# Altium PCB PCB1.PcbDoc
Units mm, origin at the board's own origin, x right, y up, seen from the top; angles counter-clockwise.
Board outline 43.25 x 20.85 mm, 2 copper layers (Top Layer, Bottom Layer); 12 components, 11 nets, 37 pads, 7 vias.
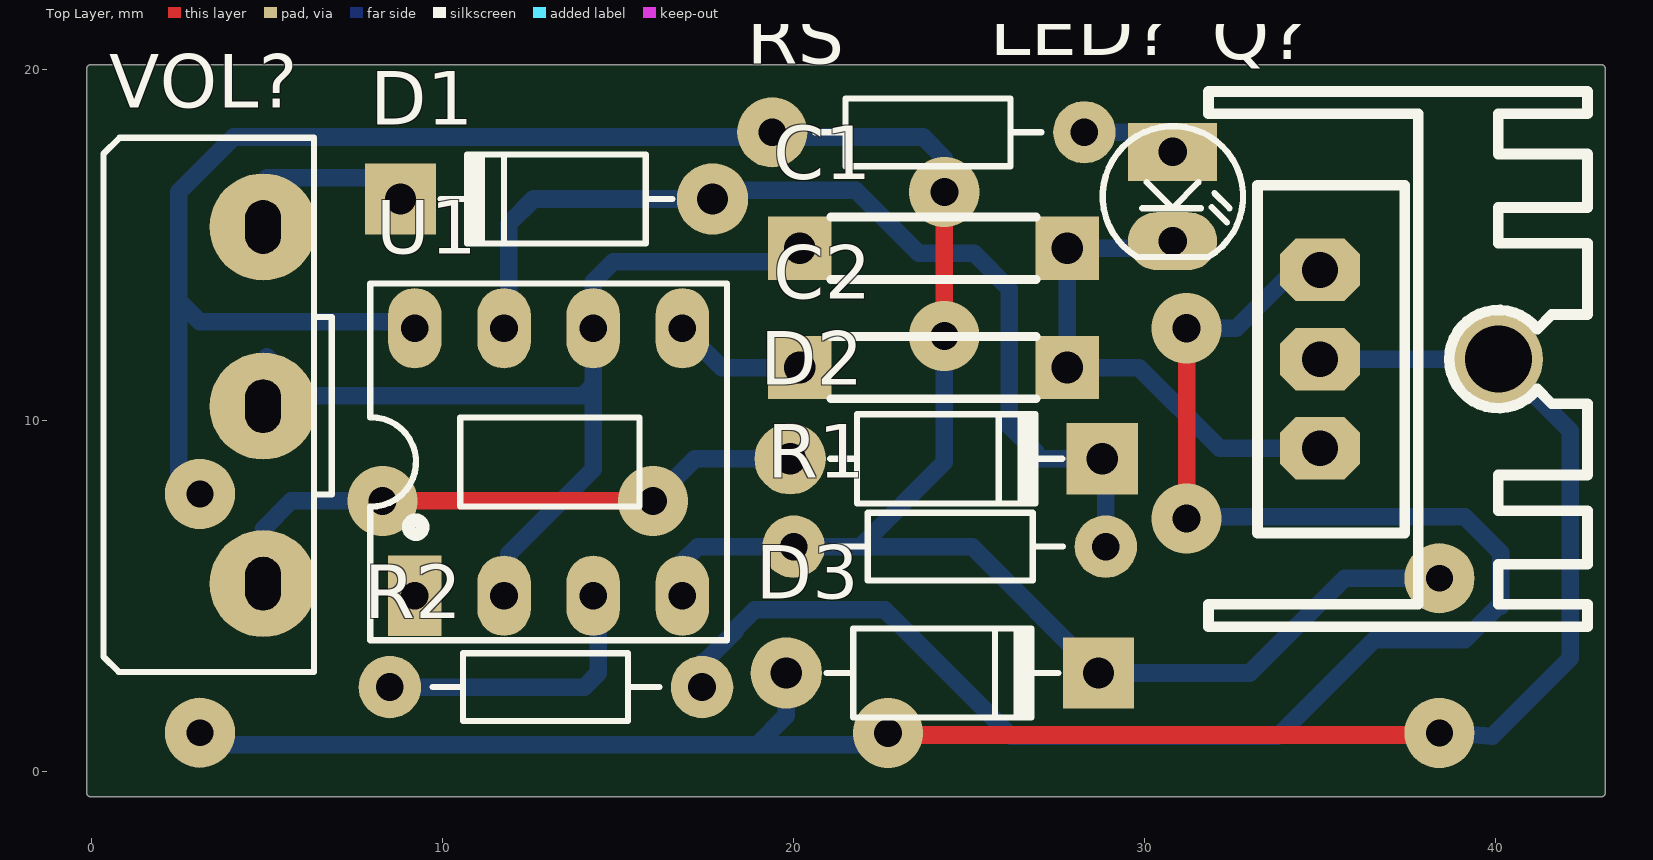
[diagram p0: Top Layer view]
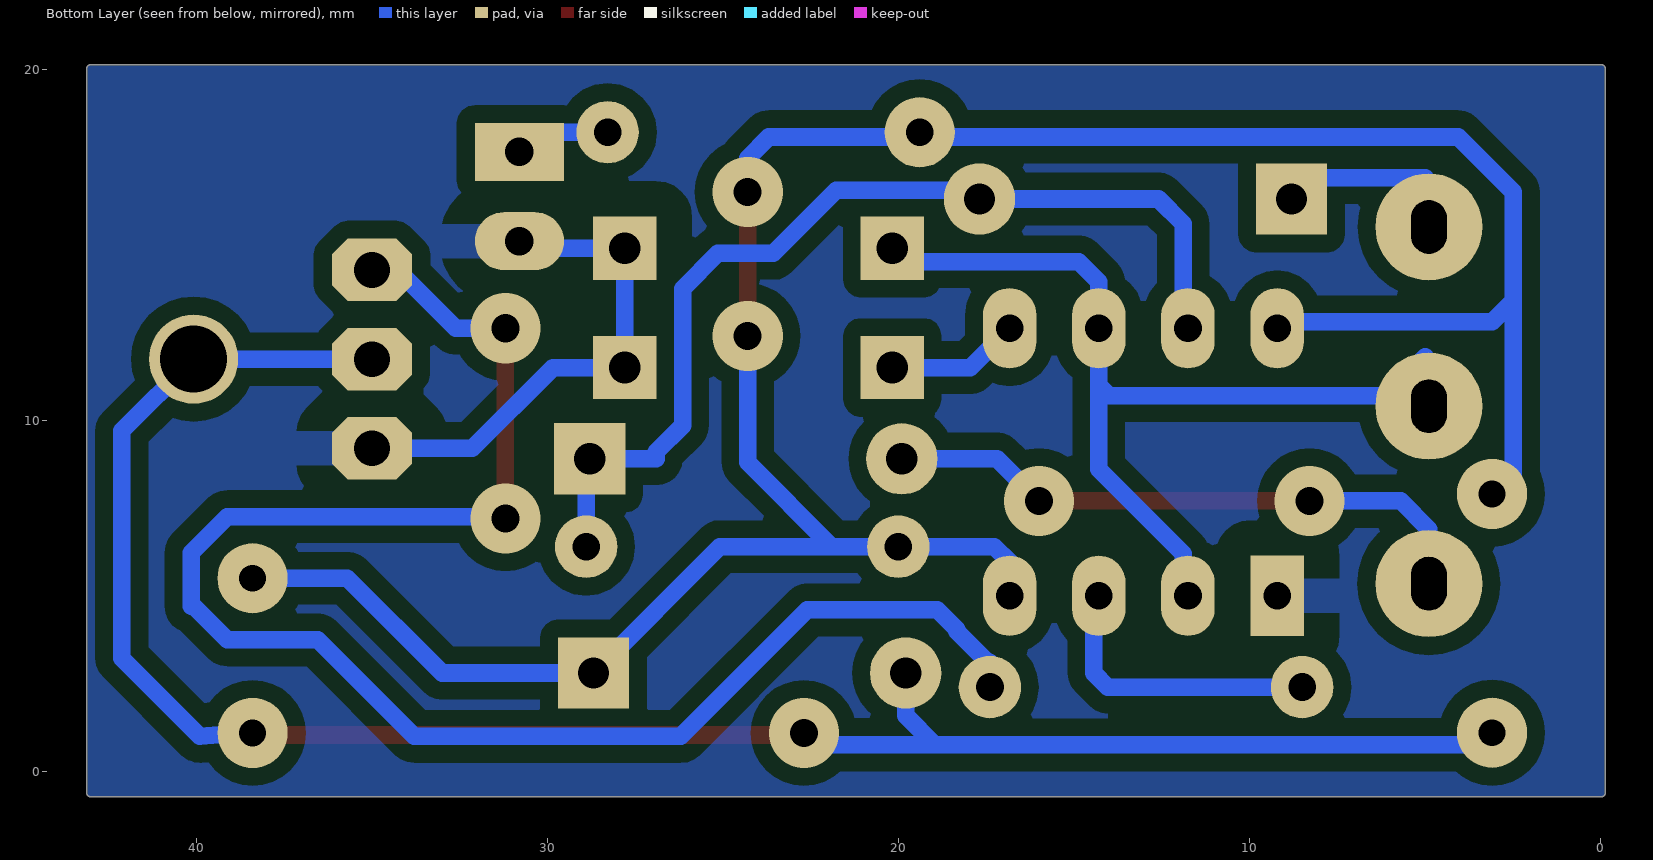
[diagram p1: Bottom Layer view, seen from below]
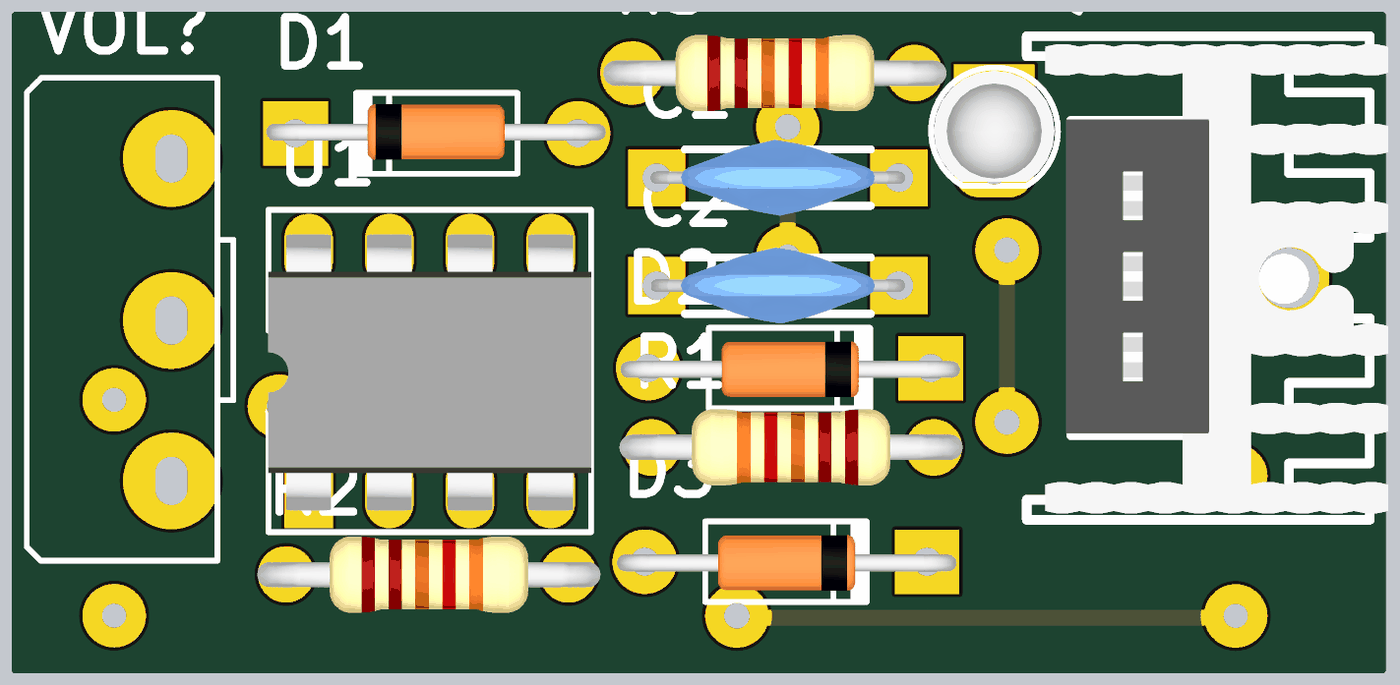
[diagram p2: 3D render of the assembled board from above, using the file's embedded part models]

## Layer stack, top to bottom
Top Solder: solder mask 0.0102, Solder Resist, Dk 3.5
Top Layer: signal copper 0.0356
Dielectric 1: dielectric 0.32, FR-4, Dk 4.8
Bottom Layer: signal copper 0.0356
Bottom Solder: solder mask 0.0102, Solder Resist, Dk 3.5

## Board outline
-0.127,-0.6 ccw(c0,-0.6) 0,-0.727 43,-0.727 ccw(c43,-0.6) 43.127,-0.6 43.127,20 ccw(c43,20) 43,20.127 0,20.127 ccw(c0,20) -0.127,20

## Design rules (kind name [scope] priority, off if disabled: settings)
Clearance [All] p1: gap=0.5 ignorepadtopadclearanceinfootprint=FALSE
PolygonConnect [All] p1: connectstyle=Relief reliefconductorwidth=1 reliefentries=4 polygonreliefangle="90 Angle" airgapwidth=1
RoutingVias [All] p1: holewidth=0.4 width=1.2 viastyle="Through Hole" minholewidth=0.4 minwidth=1.2 maxholewidth=0.4 maxwidth=1.2
SolderMaskExpansion [All] p1: expansion=0.102
Width [All] p1: maxlimit=0.5 minlimit=0.5 preferedwidth=0.5
30 further rules are at their usual default settings.

## Components (designator, comment, footprint, x,y, rotation, side; value= is the part's Value field where it differs from the comment)
C1 "Capacitor Ceramic 2KV" 103/2KV 20.18,14.9 r0 top
C2 "Capacitor Ceramic 2KV" 103/2KV 27.8,11.5 r180 top
D1 "1N4148" D1A 17.7,16.3 r0 top value=1N4007
D2 "1N4148" D1A 19.91,8.9 r180 top value=1N4007
D3 "1N4007" D1A 19.8,2.8 r180 top
LED? "LED" LED-3 30.8,17.64 r270 top value="LED 3 ly Single Colour"
Q? "IRFZ44" QTO-220H3 35,14.28 r270 top
R1 "1K" R1/4W#1 20.01,6.4 r0 top value="R1/4W - 1K"
R2 "100" R1/4W#1 17.4,2.4 r180 top value="R1/4W - 1K"
RS "1k" R1/4W#2 28.29,18.2 r180 top value="R1/4W - 1K"
U1 "NE555" DIP8 9.22,5 r0 top
VOL? "50K" VOL-S 4.9,10.425 r90 top value="Volume 50k"

## Footprints (in the part's own frame and the unit in brackets; to place one, negate y for a bottom-side part, rotate by r counter-clockwise, add the part's x,y. Pads: shape width x height; smd on the part's side, far side on the other; paste and mask are expansions set on the pad)
103/2KV [mm]
  rect 1.8x1.8 hole 0.9: 1(0,0) 2(7.62,0)
  silkscreen extent 0.89,-0.89 6.73,0.89, body extent -0.19,-1.2 7.81,1.19, height 9.03
D1A [mil] "Diode 1A, W 100mil, L 350mil"
  round 80 hole 35: 1(0,0)
  rect 80x80 hole 35: 2(-350,0)
  silkscreen extent -305,-50 -45,50, body extent -386,-33 34,36, height 84
DIP8 [mil]
  rect 60x90 hole 31: 1(0,0)
  oval 60x90 hole 31: 2(100,0) 3(200,0) 4(300,0) 5(300,300) 6(200,300) 7(100,300) 8(0,300)
  silkscreen extent -50,-50 350,350, body extent -50,-40 350,336, height 201
LED-3 [mil] "LED 2 PIN, 3ly Only colour"
  rect 65x100 hole 32: 1(0,0)
  oval 65x100 hole 32: 2(100,0)
  silkscreen extent -29,-78 118,79, body extent -25,-75 113,75, height 217
QTO-220H3 [mil] "TO-220 1-2-3"
  oct 70x90 hole 40: 1(0,0) 2(100,0) 3(200,0)
  round 100 hole 75: 2(100,200)
  silkscreen extent -200,-125 400,300, body extent -190,-102 392,323, height 984
R1/4W#1 [mil] "R 1/4W, 2 Pin, 350mil"
  round 70 hole 31: 1(0,0) 2(350,0)
  silkscreen extent 48,-38 302,38, body extent -40,-47 386,47, height 111
R1/4W#2 [mil] "R 1/4W, 2 Pin, 350mil"
  round 70 hole 31: 1(0,0)
  round 78.74 hole 31: 2(350,0)
  silkscreen extent 48,-38 302,38, body extent -40,-47 386,47, height 111
VOL-S [mil] "Volume control single"
  round 120 hole 40 slot 60 at 0 deg: 1(-200,0) 2(-1,0) 3(200,0)
  silkscreen extent -299,-77 300,179

## Part data
C1 C2: library part Cap2KV, LatestRevisionDate=17-Jul-2002, LatestRevisionNote="Re-released for DXP Platform.", PackageReference=RAD-0.3, Published=8-Jun-2000, Publisher="Altium Limited"
D1 D2 D3: library part D1A, "Diode 1A"
LED?: "LED Single colour Green and Red"
Q?: "HEXFET N-Channel Power MOSFET"
R1 R2 RS: library part R1/4W, "Resistor 1/4W"
U1: "TIMER IC", Current=200mA, Frequency=500kHz, Manufacturer=STMicroelectronics, Manufacturer Part Number=NE555DT, Operating Temperature="0°C ~ 70°C", Package / Case="8-SOIC (3.9mm Width)", Supplier Part Number=497-1962-2-ND, Voltage - Supply="4.5 V ~ 16 V", Category="Integrated Circuits (ICs)", Count=-, Packaging="Tape & Reel (TR)", RoHS="RoHS Compliant", Supplier=Digi-Key, Supplier 1=Digi-Key, Supplier Part Number 1=497-1962-2-ND, Type="555 Type, Timer/Oscillator (Single)"
VOL?: library part VOL-S, "Var Resistor"

## Free pads (board coordinates)
  round 2 hole 0.762: 3(3.1,1.1) 3(3.1,7.9) 3(38.4,1.093) 3(38.4,5.5)

## Via types
v1: diameter 2, hole 0.8, Top Layer to Bottom Layer, 7 vias

## Nets (pads, with @x,y where several pads share a name; then routed paths per layer and width w, separated by ;. In a path a pad name is that pad's centre, name@x,y a point inside that pad or via, vN(x,y) a via of type N, cw(c..) or ccw(c..) an arc to the next point about the centre after c; other vN are vias at no path point)
GND: C1.2 C2.1 LED?.2 Q?.3 U1.1 | length 14.6
  Bottom Layer w0.5: LED?.2 30.6,14.9 C1.2 C2.1 29.845,11.5 32.145,9.2 Q?.3
M+: D3.2 pad.3@3.1,7.9 pad.3@38.4,5.5 R1.1 RS.2 U1.4 U1.8 | length 75.4
  Top Layer w0.5: v1(24.3,12.4) v1(24.3,16.5)
  Bottom Layer w0.5: pad.3@2.5,8.2 2.5,13.4 ; U1.8 9.04,12.8 3.1,12.8 2.5,13.4 ; U1.4 16.84,5.965 17.275,6.4 R1.1 21.9,6.4 ; v1(24.3,12.4) 24.3,8.8 21.9,6.4 ; v1(24.3,16.5) 24.3,17.466 23.7,18.066 4.066,18.066 2.5,16.5 2.5,13.4 ; pad.3@38.4,5.5 35.7,5.5 33,2.8 D3.2 25.09,6.4 21.9,6.4
M-: D3.1 pad.3@3.1,1.1 pad.3@38.4,1.093 Q?.2 | length 56.9
  Top Layer w0.5: v1(22.7,1.093) 22.759,1.034 38.341,1.034 pad.3@38.4,1.093
  Bottom Layer w0.5: pad.3@3.1,1.1 3.439,0.761 18.971,0.761 ; D3.1 19.8,1.59 18.971,0.761 ; v1(22.7,1.093) 22.368,0.761 18.971,0.761 ; Q?.2@35,11.74 40.08,11.74 42.123,9.697 42.123,3.223 39.9,1 pad.3@38.6,1.093
NetC1_1: C1.1 U1.2 U1.6 VOL?.2 | length 26.9
  Bottom Layer w0.5: VOL?.2@5,11.8 6.1,10.7 14,10.7 14.3,11 ; U1.2@11.9,4.3 11.9,6.2 14.3,8.6 14.3,11 ; C1.1@19.72,14.44 C1.1@19.793,14.513 ; C1.1 C1.1@19.793,14.513 ; 14.3,11 U1.6 14.3,13.94 14.873,14.513 C1.1@19.793,14.513
NetC2_2: C2.2 U1.5 | length 3.8
  Bottom Layer w0.5: U1.5 17.96,11.5 C2.2
NetD1_1: D1.1 D2.2 R1.2 U1.7 | length 29.3
  Bottom Layer w0.5: U1.7@11.9,11.92 11.9,15.6 12.6,16.3 D1.1 17.7,16.55 D1.1@18.25,16.55 ; D1.1@18,16.3 D1.1@18.25,16.55 ; D2.2 26.9,8.9 26.9,9.1 26.15,9.85 26.15,13.75 25.15,14.75 23.575,14.75 21.775,16.55 D1.1@18.25,16.55 ; R1.2 28.9,8.2 D2.2@29.2,8.5
NetD1_2: D1.2 VOL?.3 | length 4
  Bottom Layer w0.5: VOL?.3@5,16.905 8.595,16.905 D1.2@8.9,16.6
NetD2_1: D2.1 VOL?.1 | length 17.4
  Top Layer w0.5: v1(8.3,7.7) 15.3,7.7 15.5,7.5 15.7,7.7 v1(16,7.7)
  Bottom Layer w0.5: VOL?.1@4.9,5.545 4.9,6.9 5.7,7.7 v1(8.3,7.7) ; v1(16,7.7) 17.2,8.9 D2.1
NetLED?_1: LED?.1 RS.1 | length 2.7
  Bottom Layer w0.5: RS.1 30.24,18.2 LED?.1
NetQ?_1: Q?.1 R2.1 | length 48.1
  Top Layer w0.5: v1(31.2,7.2) v1(31.2,12.62)
  Bottom Layer w0.5: R2.1 17.4,3.1 17.407,3.107 17.466,3.107 18.352,3.993 18.352,4.052 18.9,4.6 22.6,4.6 26.204,0.996 30.479,0.996 30.483,1 33.8,1 36.55,3.75 39.125,3.75 40.075,4.7 40.15,4.7 40.15,6.225 39.125,7.25 31.25,7.25 v1(31.2,7.2) ; v1(31.2,12.62) 32.62,12.62 34.28,14.28 Q?.1 Q?.1@35.12,14.4
NetR2_2: R2.2 U1.3 | length 7.6
  Bottom Layer w0.5: R2.2 14.04,2.4 14.44,2.8 U1.3@14.44,4.3

## Polygon pours and split planes (outlines as drawn)
GND on Bottom Layer "GND_L02_P028" (solid, pour order 28): -0.1,20.1 -0.1,-0.7 43.1,-0.7 43.1,20.1